# EAGLE board tyraka (EAGLE 9.3.0)
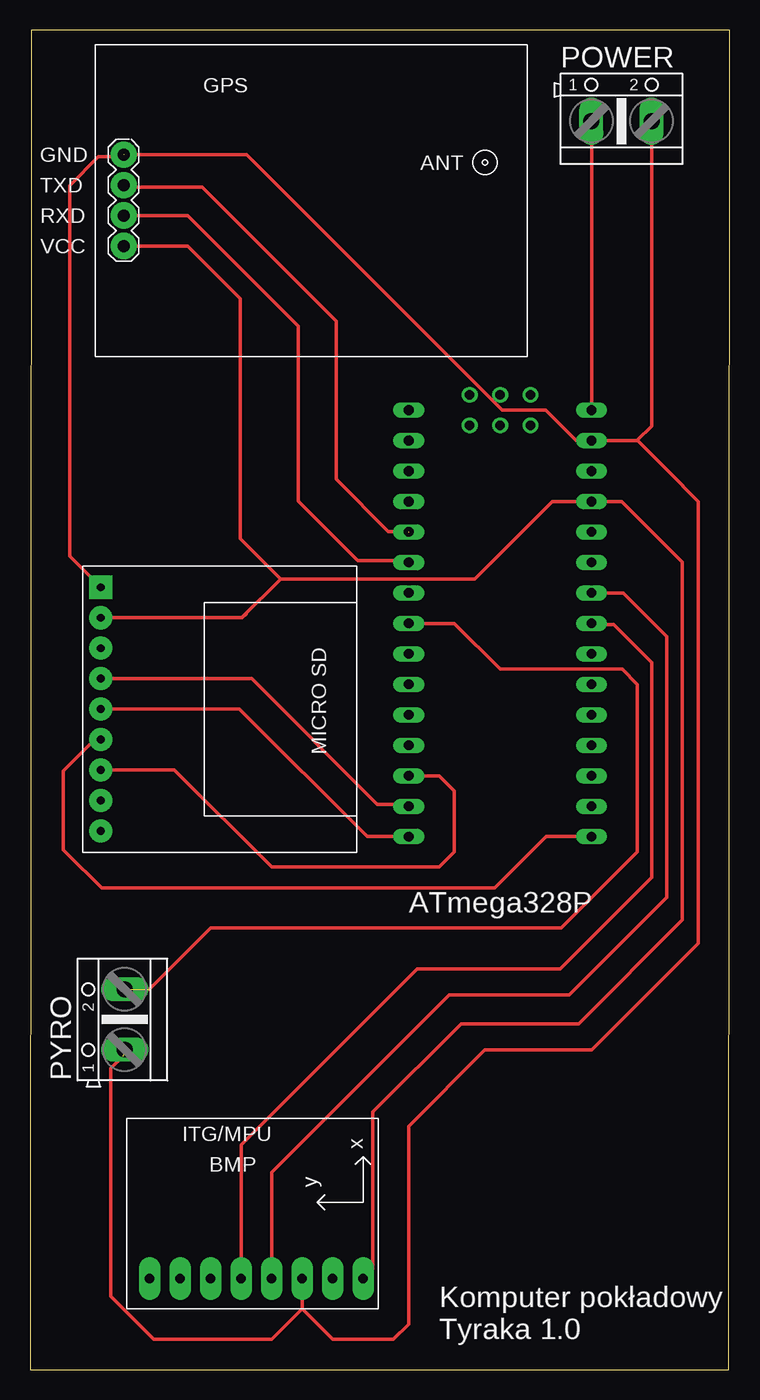
[diagram p0: board, top side]

Size 58.31 x 111.7 mm. Coordinates in mm from the lower left corner, seen from the top.
Outline: 0,0 58.21,0 58.31,111.7 0.1,111.7 0,0
Copper layers (1*16): Top 0.035mm / dielectric 1.5mm / Bottom 0.035mm
Design rules "default": minimum track width 6mil, minimum drill 0.35mm, track to track 6mil, track to pad 6mil, pad to pad 6mil, via to via 6mil, smd to smd 6mil, copper to edge 40mil, drill to drill 6mil, minimum pad ring 10mil, minimum via ring 8mil, stop-mask expansion 4mil, vias tented up to drill 0mil, thermal gap 10mil

## Footprints (pad centres in the part's own frame; a part is rotated, then mirrored left to right if it is on the bottom)
NANO = drill 0.8 long: 3.3V -10.16,24.13; 5V -10.16,-1.27; A0 -10.16,19.05; A1 -10.16,16.51; A2 -10.16,13.97; A3 -10.16,11.43; A4 -10.16,8.89; A5 -10.16,6.35; A6 -10.16,3.81; A7 -10.16,1.27; AREF -10.16,21.59; D2 5.08,1.27; D3 5.08,3.81; D4 5.08,6.35; D5 5.08,8.89; D6 5.08,11.43; D7 5.08,13.97; D8 5.08,16.51; D9 5.08,19.05; D10 5.08,21.59; D11 5.08,24.13; D12 5.08,26.67; D13 -10.16,26.67; GND -10.16,-6.35; GND1 5.08,-1.27; RAW -10.16,-8.89; RST -10.16,-3.81; RST1 5.08,-3.81; RX1 5.08,-6.35; TX0 5.08,-8.89 | drill 0.8: ICSP1 -5.08,-10.16; ICSP2 -5.08,-7.62; ICSP3 -2.54,-10.16; ICSP4 -2.54,-7.62; ICSP5 0,-10.16; ICSP6 0,-7.62
GPS-RECEIVER-NEO6M = drill 1 pad 2.184: GND -15.63,3.844; RX -15.63,-1.236; TX -15.63,1.304; VCC -15.63,-3.776
AK500/2 = drill 1.321 long: 1 -2.515,0; 2 2.515,0
MICRO_SD = drill 0.65 pad 1.93 square: P1 -9.906,10.16 | drill 0.65 pad 1.93: P2 -9.906,7.62; P3 -9.906,5.08; P4 -9.906,2.54; P5 -9.906,0; P6 -9.906,-2.54; P7 -9.906,-5.08; P8 -9.906,-7.62; P9 -9.906,-10.16
GY-521 = drill 0.8 pad 1.778 long: 3V3 -8.89,-6.35; CSB -8.89,8.89; GND -8.89,-3.81; NCS -8.89,6.35; SCL -8.89,-1.27; SDA -8.89,1.27; SDC/SAD -8.89,3.81; VIN -8.89,-8.89

## Placement (x,y rotation side)
ARDUINO  NANO  [NANO]  36.64,71.12 180 top
GPS  GPS_TYRAKA  [GPS-RECEIVER-NEO6M]  23.43,97.47 0 top
POWER  [AK500/2]  49.29,104.1 0 top
PYRO  [AK500/2]  7.89,29.21 90 top
SD1  MICRO_SD  [MICRO_SD]  15.81,55.09 0 top
U1  GY-521MPU6050  [GY-521]  18.86,16.51 90 top

## Library data of the parts
ARDUINO = Arduino-clone
GPS = gps_tyraka
POWER PYRO = con-ptr500; OC_FARNELL: unknown; OC_NEWARK: unknown
SD1 = 111_microsd
U1 = BAROMETR

## Nets
10: ARDUINO.D10 SD1.P7
+5V: ARDUINO.5V GPS.VCC SD1.P2 U1.VIN
CLK: ARDUINO.D13 SD1.P6
GND: ARDUINO.GND GPS.GND POWER.2 PYRO.1 SD1.P1 U1.GND
MISO: ARDUINO.D12 SD1.P5
MOSI: ARDUINO.D11 SD1.P4
N$1: ARDUINO.D5 PYRO.2
N$2: ARDUINO.D2 GPS.TX
N$3: ARDUINO.D3 GPS.RX
RAW: ARDUINO.RAW POWER.1
SCL: ARDUINO.A5 U1.SCL
SDA: ARDUINO.A4 U1.SDA

## Tracks (layer width: path | path; a pad name or v marks a point on that pad's centre or on a via)
10
  Top 0.305: ARDUINO.D10 34.1,49.53 35.37,48.26 35.37,43.18 34.1,41.91 20.13,41.91 12.04,50 SD1.P7
+5V
  Top 0.305: U1.VIN 28.57,8.44 28.57,21.5 35.93,28.86 45.71,28.86 54.35,37.5 54.35,67.34 49.3,72.39 ARDUINO.5V 43.52,72.39 37.08,65.95 20.89,65.95 | SD1.P2 17.65,62.7 | 17.65,62.7 17.71,62.7 18.03,63.02 | 20.89,65.95 17.65,62.7 | 20.89,65.95 17.52,69.31 17.52,89.31 13.39,93.44 13.14,93.69 GPS.VCC
CLK
  Top 0.305: ARDUINO.D13 43.01,44.45 38.73,40.16 5.96,40.16 3.04,43.09 2.79,43.34 2.79,49.94 5.39,52.55 SD1.P6
GND  (2 unrouted)
  Top 0.305: 50.61,77.5 50.61,77.47 | 50.61,77.5 51.8,78.69 POWER.2 | 22.67,5.08 20.13,2.54 10.3,2.54 6.71,6.13 6.71,25.13 7.71,26.13 | U1.GND 22.67,5.08 | 22.67,5.08 25.21,2.54 30.29,2.54 31.56,3.81 31.56,20.32 37.91,26.67 46.8,26.67 55.69,35.56 55.69,72.39 54.4,73.69 54.4,73.71 50.63,77.47 | 50.63,77.47 50.61,77.5 | 50.61,77.5 50.59,77.47 | SD1.P1 3.29,67.85 3.29,98.71 5.71,101.12 7.68,101.12 7.87,101.31 18.07,101.31 39.37,80.01 42.99,80.01 45.53,77.47 ARDUINO.GND 50.63,77.47
MISO
  Top 0.305: SD1.P5 17.46,55.09 28.09,44.45 ARDUINO.D12
MOSI
  Top 0.305: ARDUINO.D11 31.4,47.15 28.95,47.15 18.47,57.62 SD1.P4
N$1  (1 unrouted)
  Top 0.305: ARDUINO.D5 35.37,62.23 39.18,58.42 49.34,58.42 50.61,57.15 50.61,43.18 44.26,36.83 15.05,36.83 9.95,31.72
N$2  (1 unrouted)
  Top 0.305: 31.5,69.91 29.87,69.91 25.52,74.25 25.52,87.41 14.34,98.59 7.99,98.59 GPS.TX
N$3
  Top 0.305: ARDUINO.D3 31.4,67.47 29.84,67.47 29.71,67.47 27.3,67.47 22.34,72.42 22.34,87.03 13.14,96.23 GPS.RX
RAW
  Top 0.305: 46.83,79.98 ARDUINO.RAW 46.8,104.08 POWER.1
SCL
  Top 0.305: U1.SCL 20.13,16.49 34.92,31.27 44.95,31.27 53.08,39.4 53.08,61.12 49.43,64.77 ARDUINO.A5
SDA
  Top 0.305: ARDUINO.A4 46.89,62.14 48.63,62.14 51.81,58.96 51.81,41.05 44.19,33.43 32.25,33.43 17.59,18.77 U1.SDA

## Text on the board
tPlace: ATmega328P | Komputer pokładowy / Tyraka 1.0